# EAGLE board dc-motor-noise-suppressor (EAGLE 5.02)
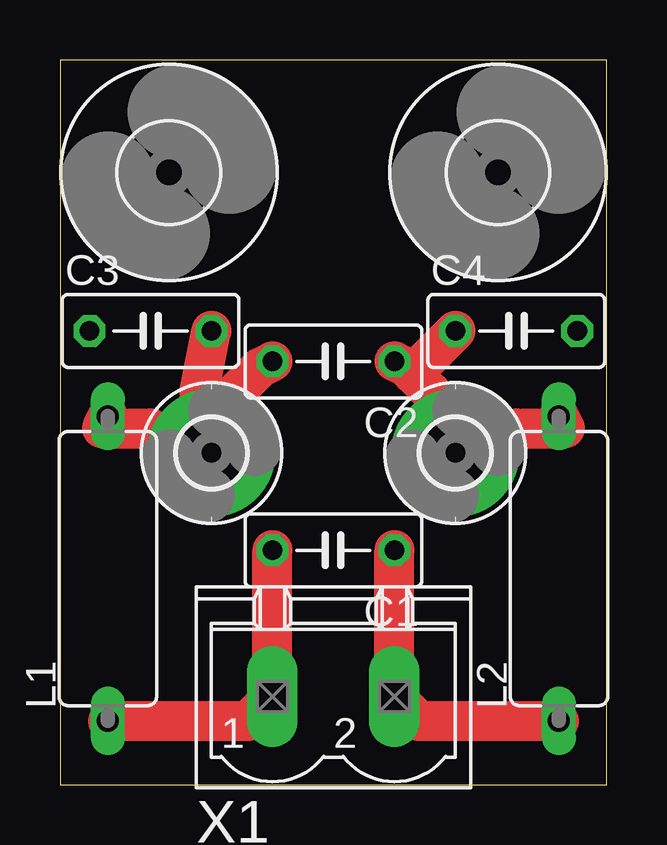
[diagram p0: board, top side]

Size 22.78 x 30.22 mm. Coordinates in mm from the lower left corner, seen from the top.
Outline: 0,0 22.78,0 22.78,30.22 0,30.22 0,0
Copper layers (1*16): Top 0.035mm / dielectric 1.5mm / Bottom 0.035mm
Design rules "default": minimum track width 10mil, minimum drill 24mil, track to track 8mil, track to pad 8mil, pad to pad 8mil, via to via 8mil, smd to smd 8mil, copper to edge 40mil, drill to drill 8mil, minimum pad ring 10mil, minimum via ring 8mil, stop-mask expansion 4mil, vias tented up to drill 0mil, thermal gap 10mil
Net classes: 0 default: width 1.676 mm, clearance 0.406 mm

## Footprints (pad centres in the part's own frame; a part is rotated, then mirrored left to right if it is on the bottom)
C050-030X075 = drill 0.813 octagon: 1 -2.54,0; 2 2.54,0
2,8-PAD = drill 2.8 pad 5.334 round: B2,8 0,0
4,1 = hole 4.1: 0,0
BC12 = drill 0.914 long: 1 -6.35,0; 2 6.35,0
MSTBV2 = drill 1.397 long: 1 -2.54,0; 2 2.54,0

## Placement (x,y rotation side)
C1  10nF  [C050-030X075]  11.39,9.77 180 top
C2  1nF  [C050-030X075]  11.39,17.65 180 top
C3  1nF  [C050-030X075]  3.77,18.92 0 top
C4  1nF  [C050-030X075]  19.01,18.92 0 top
H1  MOUNT-PAD-ROUND2.8  [2,8-PAD]  6.31,13.84 0 top
H2  MOUNT-PAD-ROUND2.8  [2,8-PAD]  16.47,13.84 0 top
H3  MOUNT-HOLE4.1  [4,1]  4.53,25.52 0 top
H4  MOUNT-HOLE4.1  [4,1]  18.25,25.52 0 top
L1  BC12  [BC12]  1.99,9.01 90 top
L2  BC12  [BC12]  20.79,9.01 90 top
X1  MSTBV2  [MSTBV2]  11.39,3.68 0 top

## Library data of the parts
C1-C4 = rcl
H1-H4 = holes
L1 L2 = inductors
X1 = con-phoenix-508

## Nets
N$1: C1.2 L1.1 X1.1
N$2: C1.1 L2.1 X1.2
N$3: C2.2 C3.2 H1.B2,8 L1.2
N$5: C2.1 C4.1 H2.B2,8 L2.2

## Tracks (layer width: path | path; a pad name or v marks a point on that pad's centre or on a via)
N$1
  Top 1.676: C1.2 X1.1 7.84,2.66 L1.1
N$2
  Top 1.676: C1.1 X1.2 14.95,2.66 L2.1
N$3
  Top 1.676: C3.2 5.8,16.38 H1.B2,8 | C2.2 8.34,17.39 7.33,16.38 H1.B2,8 | L1.2 1.74,14.85 3.77,14.85 H1.B2,8
N$5
  Top 1.676: 14.69,17.14 15.46,16.38 H2.B2,8 19.01,14.85 21.04,14.85 L2.2 | 14.69,17.14 14.44,17.39 C2.1 | 14.69,17.14 C4.1